# Altium PCB NRF24L01_test_node.PcbDoc
Units mm, origin at the board's own origin, x right, y up, seen from the top; angles counter-clockwise.
Board outline 26 x 20 mm, 2 copper layers (Top Layer, Bottom Layer); 17 components, 22 nets, 80 pads, 5 vias.
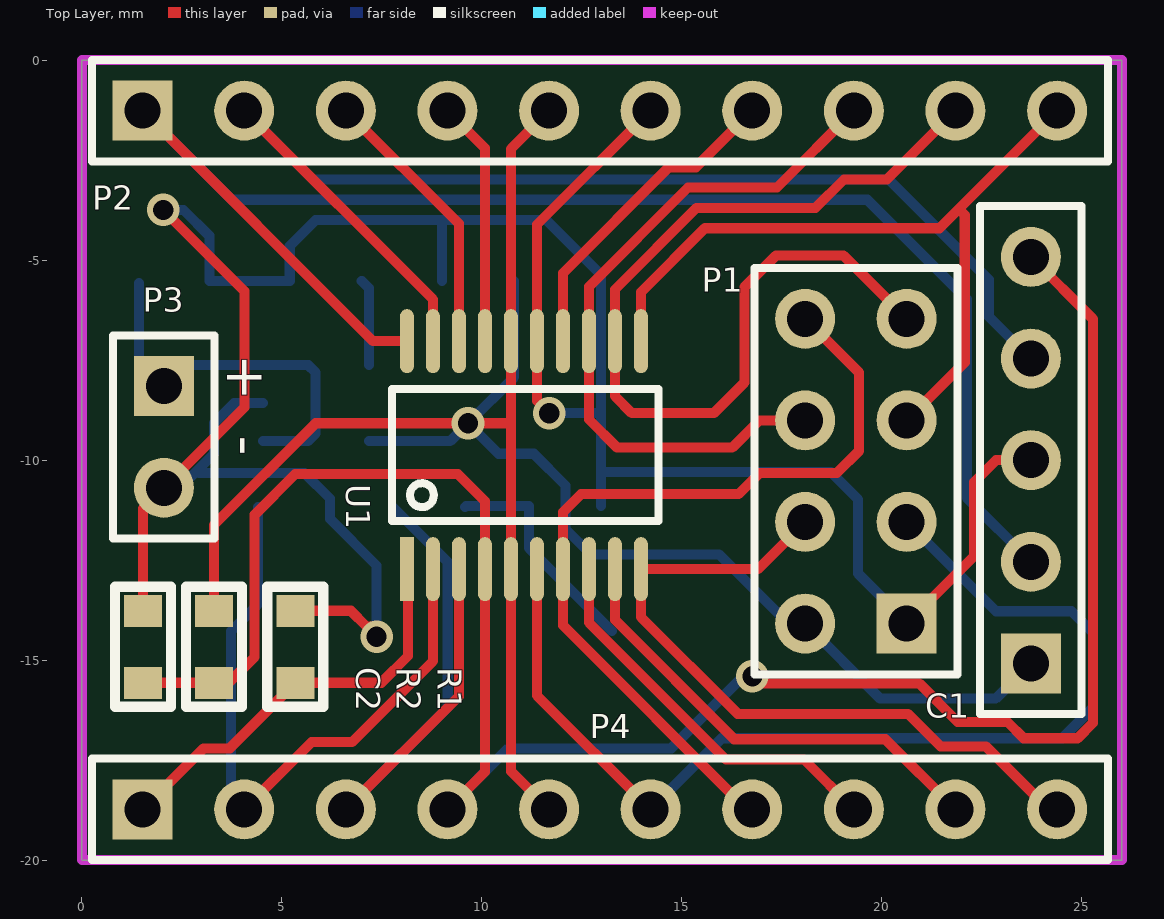
[diagram p0: Top Layer view]
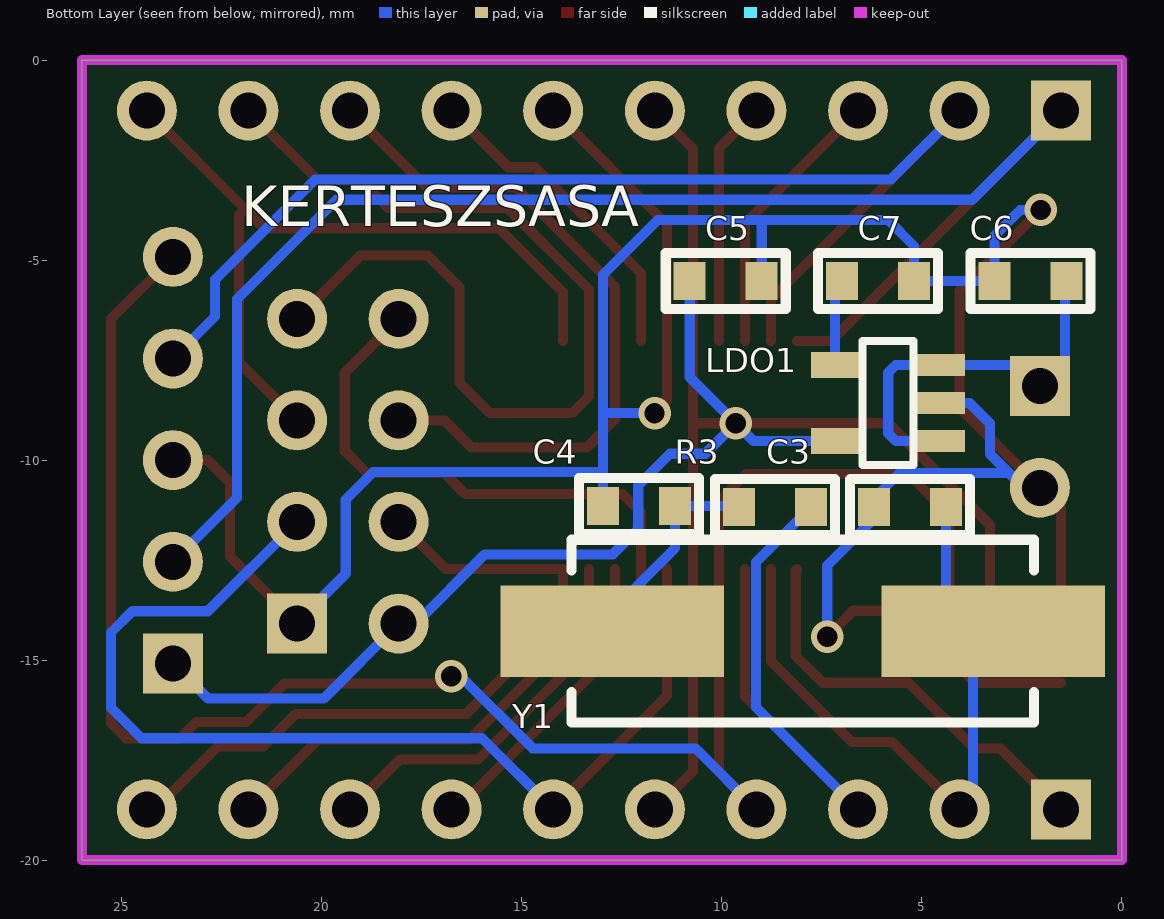
[diagram p1: Bottom Layer view, seen from below]

## Layer stack, top to bottom
Top Layer: signal copper 0.0356
Dielectric: dielectric 0.32, FR-4, Dk 4.8
Bottom Layer: signal copper 0.0356

## Board outline
0,-20 0,0 26,0 26,-20

## Design rules (kind name [scope] priority, off if disabled: settings)
Clearance [All] p1: gap=0.254
PolygonConnect [All] p1: connectstyle=Relief reliefconductorwidth=0.254 reliefentries=4 polygonreliefangle="90 Angle"
RoutingVias [All] p1: holewidth=0.711 width=1.27 viastyle="Through Hole" minholewidth=0.711 minwidth=1.27 maxholewidth=0.711 maxwidth=1.27
SilkToSilkClearance [All] p1: silktosilkclearance=0
SilkscreenOverComponentPads [All] p1: minsilkscreentomaskgap=0
SolderMaskExpansion [All] p1: expansion=0.102
Width [All] p1: maxlimit=0.254 minlimit=0.254 preferedwidth=0.254
26 further rules are at their usual default settings.

## Classes and differential pairs
component class NRF24L01_test_node: C1 C2 C3 C4 C5 C6 C7 LDO1 P1 P3 P4 R1 R2 R3 U1 Y1

## Components (designator, comment, footprint, x,y, rotation, side; value= is the part's Value field where it differs from the comment)
C1 "SWD" SWD 23.725,-10 r180 top
C2 "100nF" FP_0603_CAP_080 1.524,-14.666 r90 top
C3 "22p" FP_0603_CAP_080 5.3,-11.175 r180 bottom
C4 "22p" FP_0603_CAP_080 12.075,-11.15 r180 bottom
C5 "10uF" FP_0603_CAP_080 9.906,-5.522 r0 bottom
C6 "10uF" FP_0603_CAP_080 2.286,-5.522 r180 bottom
C7 "10nF" FP_0603_CAP_080 6.096,-5.522 r0 bottom
LDO1 "LP2985IM5-3.3" SUPPLY_SOT23-5 5.85,-8.575 r0 bottom
P1 "Header 4X2" FP_CONN8_SZK_ALLO 19.35,-10.275 r90 top
P2 "Header 10" HDR1X10 1.518,-1.264 r0 top
P3 "Header 2" HDR1X2 2.05,-8.15 r270 top
P4 "Header 10" HDR1X10 1.518,-18.73 r0 top
R1 "10k" FP_0603_RES 5.334,-14.666 r270 top
R2 "10k" FP_0603_RES 3.302,-14.666 r270 top
R3 "390R" FP_0603_RES 8.675,-11.175 r0 bottom
U1 "STM32F030F4P6" uC_TSSOP20 11.7,-9.875 r90 top
Y1 "8MHz Quartz HC49" FP_CRYSTAL_HC49_SMD 12.742,-14.275 r180 bottom

## Footprints (in the part's own frame and the unit in brackets; to place one, negate y for a bottom-side part, rotate by r counter-clockwise, add the part's x,y. Pads: shape width x height; smd on the part's side, far side on the other; paste and mask are expansions set on the pad)
FP_0603_CAP_080 [mm] "0.8mm magas 0603 kapacitás"
  rect 0.8x0.95 smd: 1(-0.9,0) 2(0.9,0)
  silkscreen extent -1.5,-0.7 1.5,0.7, body extent -0.8,-0.4 0.76,0.4, height 0.8
FP_0603_RES [mm] "0603 ellenállás"
  rect 0.8x0.95 smd: 1(-0.9,0) 2(0.9,0)
  silkscreen extent -1.5,-0.7 1.5,0.7, body extent -0.8,-0.4 0.8,0.4, height 0.44
FP_CONN8_SZK_ALLO [mm] "Connector; Header; 4x2 Position"
  rect 1.5x1.5 hole 0.9: 1(-3.81,-1.27)
  round 1.5 hole 0.9: 2(-3.81,1.27) 3(-1.27,-1.27) 4(-1.27,1.27) 5(1.27,-1.27) 6(1.27,1.27) 7(3.81,-1.27) 8(3.81,1.27)
  silkscreen extent -5.08,-2.54 5.08,2.54
FP_CRYSTAL_HC49_SMD [mil] "HC49/SMD"
  rect 220x90 smd: 1(0,0) 2(375,0)
  silkscreen extent -40,-90 415,90, body extent -57,-90 432,90, height 130
HDR1X2 [mm] "Connector; Header; 2 Position"
  rect 1.5x1.5 hole 0.9: 1(0,0)
  round 1.5 hole 0.9: 2(2.54,0)
  silkscreen extent -1.27,-1.27 3.81,1.27
HDR1X10 [mm] "Connector; Header; 10 Position"
  rect 1.5x1.5 hole 0.9: 1(0,0)
  round 1.5 hole 0.9: 2(2.54,0) 3(5.08,0) 4(7.62,0) 5(10.16,0) 6(12.7,0) 7(15.24,0) 8(17.78,0) 9(20.32,0) 10(22.86,0)
  silkscreen extent -1.27,-1.27 24.13,1.27
SUPPLY_SOT23-5 [mm] "SOT23, 5-Leads, Body 2.9x1.6mm, Pitch 0.95mm, Lead Span 2.8mm, IPC Medium Density"
  rect 1.2x0.55 smd mask+0.05: 1(-1.327,0.95) 2(-1.327,0) 3(-1.327,-0.95)
  rect 1.2x0.65 smd: 4(1.327,-0.95) 5(1.327,0.95)
  silkscreen extent -0.64,-1.55 0.64,1.55, body extent -1.17,-1.46 1.17,1.46, height 1
SWD [mm]
  rect 1.5x1.5 hole 0.9: 1(0,5.08)
  round 1.5 hole 0.9: 2(0,2.54) 3(0,0) 4(0,-2.54) 5(0,-5.08)
  silkscreen extent -1.27,-6.35 1.27,6.35
uC_TSSOP20 [mm]
  rect 1.6x0.35 smd: 1(-2.85,3.575)
  oval 1.6x0.35 smd: 2(-2.85,2.925) 3(-2.85,2.275) 4(-2.85,1.625) 5(-2.85,0.975) 6(-2.85,0.325) 7(-2.85,-0.325) 8(-2.85,-0.975) 9(-2.85,-1.625) 10(-2.85,-2.275) 11(2.85,-2.275) 12(2.85,-1.625) 13(2.85,-0.975) 14(2.85,-0.325) 15(2.85,0.325) 16(2.85,0.975) 17(2.85,1.625) 18(2.85,2.275) 19(2.85,2.925) 20(2.85,3.575)
  silkscreen extent -1.65,-2.72 1.65,3.95, body extent -3.1,-2.72 3.18,3.78, height 1.09

## Part data
C1: "ARM SWD connector"
C2 C3 C4 C5 C6 C7: library part Cap, "Capacitor"
LDO1: library part LP2985, "Micropower 150 mA Ultra Low-Dropout Regulator In SOT-23/6 and micro SMD Packages"
P1: "Header, 4-Pin, Dual row"
P2 P4: "Header, 10-Pin"
P3: "Header, 2-Pin"
R1 R2 R3: library part Res3, "Resistor"
U1: "MCU 32-bit STM32F ARM Cortex M0 RISC 16KB Flash 2.5V/3.3V 20-Pin TSSOP"
Y1: library part "XTAL HC49", "Standard HC49 quartz"

## Via types
v1: diameter 0.813, hole 0.508, Top Layer to Bottom Layer, 5 vias

## Nets (pads, with @x,y where several pads share a name; then routed paths per layer and width w, separated by ;. In a path a pad name is that pad's centre, name@x,y a point inside that pad or via, vN(x,y) a via of type N, cw(c..) or ccw(c..) an arc to the next point about the centre after c; other vN are vias at no path point)
3V3: C1.1 C5.2 LDO1.5 P1.2 P2.5 P4.5 R2.1 U1.5 U1.16 | length 53.5
  Top Layer w0.254: R2.1 3.302,-11.618 5.842,-9.078 v1(9.652,-9.078) 10.725,-9.078 ; P4.5 10.725,-17.777 U1.5 10.725,-9.078 ; P2.5 10.725,-2.217 U1.16 10.725,-9.078
  Bottom Layer w0.254: LDO1.5 9.205,-9.525 v1(9.652,-9.078) ; C5.2 10.806,-7.924 v1(9.652,-9.078) ; C1.1 22.844,-15.961 19.956,-15.961 P1.2 17.656,-14.085 15.926,-12.355 12.725,-12.355 12.09,-11.72 12.09,-10.634 11.297,-9.84 10.414,-9.84 v1(9.652,-9.078)
5V: C6.2 LDO1.1 LDO1.3 P3.1 | length 9.8
  Bottom Layer w0.254: C6.2@1.425,-5.575 1.425,-7.525 P3.1 2.575,-7.625 LDO1.3 5.659,-7.625 5.842,-7.808 5.842,-9.332 5.649,-9.525 LDO1.1
BOOT0: P4.1 R1.2 U1.1 | length 11
  Top Layer w0.254: P4.1@2.12,-18.73 P4.1 3.042,-17.206 3.694,-17.206 R1.2 7.482,-15.566 8.154,-14.894 8.154,-12.754 U1.1
GND: C1.3 C2.2 C3.1 C4.1 C5.1 C6.1 C7.1 LDO1.2 P1.1 P2.6 P3.2 R1.1 U1.15 | length 74
  Top Layer w0.254: C2.2 1.524,-11.216 P3.2 4.064,-8.676 4.064,-5.776 v1(2.032,-3.744) ; R1.1 6.72,-13.766 7.113,-14.159 v1@7.367,-14.159 ; v1(11.684,-8.824) 11.375,-8.515 U1.15 11.375,-4.107 P2.6 ; P1.1@20.62,-13.706 P1.1 22.301,-12.404 22.301,-10.551 22.852,-10 C1.3 C1.3@23.725,-10.601
  Bottom Layer w0.254: v1(2.032,-3.744) 2.54,-3.744 3.186,-4.39 C6.1 C7.1 5.196,-4.644 5.842,-3.998 8.636,-3.998 11.608,-3.998 12.975,-5.365 12.975,-8.824 ; P3.2 2.452,-10.69 2.877,-10.265 ; LDO1.2 3.805,-8.575 3.302,-9.078 3.302,-9.84 2.877,-10.265 ; v1(7.366,-14.412) 7.366,-12.634 6.2,-11.468 C3.1 6.2,-10.96 5.559,-10.319 2.931,-10.319 2.877,-10.265 ; C5.1 9.006,-4.023 ; v1(11.684,-8.824) 12.975,-8.824 ; C4.1 12.975,-8.824 ; 13.106,-10.297 18.72,-10.297 19.406,-10.983 19.406,-12.837 20.62,-14.052 P1.1
GPOI_1: P4.8 U1.8 | length 9.9
  Top Layer w0.254: U1.8 12.675,-14.062 16.099,-17.485 18.053,-17.485 P4.8
GPOI_2: P4.9 U1.9 | length 11.7
  Top Layer w0.254: U1.9 13.325,-13.993 16.309,-16.977 20.085,-16.977 P4.9
GPOI_3: P2.7 U1.14 | length 8.1
  Top Layer w0.254: U1.14 12.025,-5.325 14.673,-2.677 15.345,-2.677 P2.7
GPOI_4: P2.4 U1.17 | length 6.1
  Top Layer w0.254: P2.4 10.075,-2.201 U1.17
GPOI_5: P2.3 U1.18 | length 6.9
  Top Layer w0.254: P2.3 9.425,-4.091 U1.18
MISO: P1.7 P2.9 U1.12 | length 24.2
  Top Layer w0.254: P1.7 19.042,-4.887 17.348,-4.887 16.561,-5.674 16.561,-8.062 15.799,-8.824 13.749,-8.824 13.325,-8.4 U1.12 13.325,-5.732 15.363,-3.693 18.339,-3.693 19.05,-2.982 20.12,-2.982 P2.9
MOSI: P1.6 P2.8 U1.13 | length 17.7
  Top Layer w0.254: P1.6 16.939,-9.005 16.256,-9.688 13.381,-9.688 12.675,-8.982 U1.13 12.675,-5.663 15.153,-3.185 17.377,-3.185 P2.8
NetC4_2: C4.2 R3.2 Y1.1 | length 5.6
  Bottom Layer w0.254: R3.2 9.6,-11.15 C4.2 11.175,-12.2 Y1.1@13.25,-14.275
NetC7_2: C7.2 LDO1.4 | length 2.2
  Bottom Layer w0.254: C7.2 7.177,-5.703 LDO1.4
NRF24_CE: P1.3 P4.6 U1.6 | length 27
  Top Layer w0.254: U1.6 11.375,-15.887 P4.6
  Bottom Layer w0.254: P4.6 15.996,-16.952 24.511,-16.952 25.273,-16.19 25.273,-14.31 24.74,-13.777 22.852,-13.777 P1.3
NRF24_IRQ: P1.8 P4.7 U1.7 | length 21.4
  Top Layer w0.254: P4.7 16.625,-18.73 12.025,-14.13 U1.7 12.025,-11.3 12.475,-10.85 16.414,-10.85 16.942,-10.323 18.872,-10.323 19.431,-9.764 19.431,-7.816 P1.8
NRF24_SS: P1.4 P4.10 U1.10 | length 18.2
  Top Layer w0.254: P1.4 16.9,-12.725 U1.10 13.975,-13.925 16.392,-16.342 20.65,-16.342 21.463,-17.155 22.597,-17.155 24.172,-18.73 P4.10
NRST: C1.5 C2.1 P4.4 R2.2 U1.4 | length 51.6
  Top Layer w0.254: C2.1 3.672,-15.566 4.318,-14.92 4.318,-11.364 5.334,-10.348 9.398,-10.348 10.075,-11.025 U1.4 10.075,-17.793 P4.4 ; v1(16.764,-15.403) 16.942,-15.58 20.93,-15.58 21.895,-16.546 23.139,-16.546 23.546,-16.952 24.892,-16.952 25.273,-16.571 25.273,-6.468 C1.5
  Bottom Layer w0.254: P4.4 10.662,-17.206 14.732,-17.206 v1@16.561,-15.377
OSC_IN: C3.2 P4.2 U1.2 Y1.2 | length 16.5
  Top Layer w0.254: P4.2 5.738,-17.05 6.75,-17.05 8.775,-15.025 U1.2
  Bottom Layer w0.254: P4.2 3.725,-18.397 3.725,-14.275 4.4,-13.6 C3.2
OSC_OUT: P4.3 R3.1 U1.3 | length 16.4
  Top Layer w0.254: P4.3 9.425,-15.903 U1.3
  Bottom Layer w0.254: P4.3 9.144,-16.184 9.144,-12.544 R3.1
SCK: P1.5 P2.10 U1.11 | length 19.5
  Top Layer w0.254: U1.11 13.975,-5.8 15.574,-4.201 21.441,-4.201 21.922,-3.72 ; P1.5 22.073,-7.552 22.073,-3.871 21.922,-3.72 ; P2.10 21.922,-3.72
TCK: C1.2 P2.1 U1.20 | length 38.8
  Top Layer w0.254: P2.1 7.279,-7.025 U1.20
  Bottom Layer w0.254: P2.1 3.744,-3.49 19.634,-3.49 22.123,-5.979 22.123,-10.938 C1.2
TMS: C1.4 P2.2 U1.19 | length 30.5
  Top Layer w0.254: P2.2 8.775,-5.981 U1.19
  Bottom Layer w0.254: P2.2 5.776,-2.982 20.168,-2.982 22.672,-5.487 22.672,-6.407 C1.4

## Keep-outs
Keep-Out Layer:
  the board outline again, w0.254

## Silkscreen, mask and mechanical layers (free items; w line width, h text height)
Top Overlay:
  text "+  -" at 3.632,-7.351 h1.02 r270
Bottom Overlay:
  text "KERTESZSASA" at 22.022,-4.15 h1.02